# EAGLE board usb-foc (EAGLE 9.6.2)
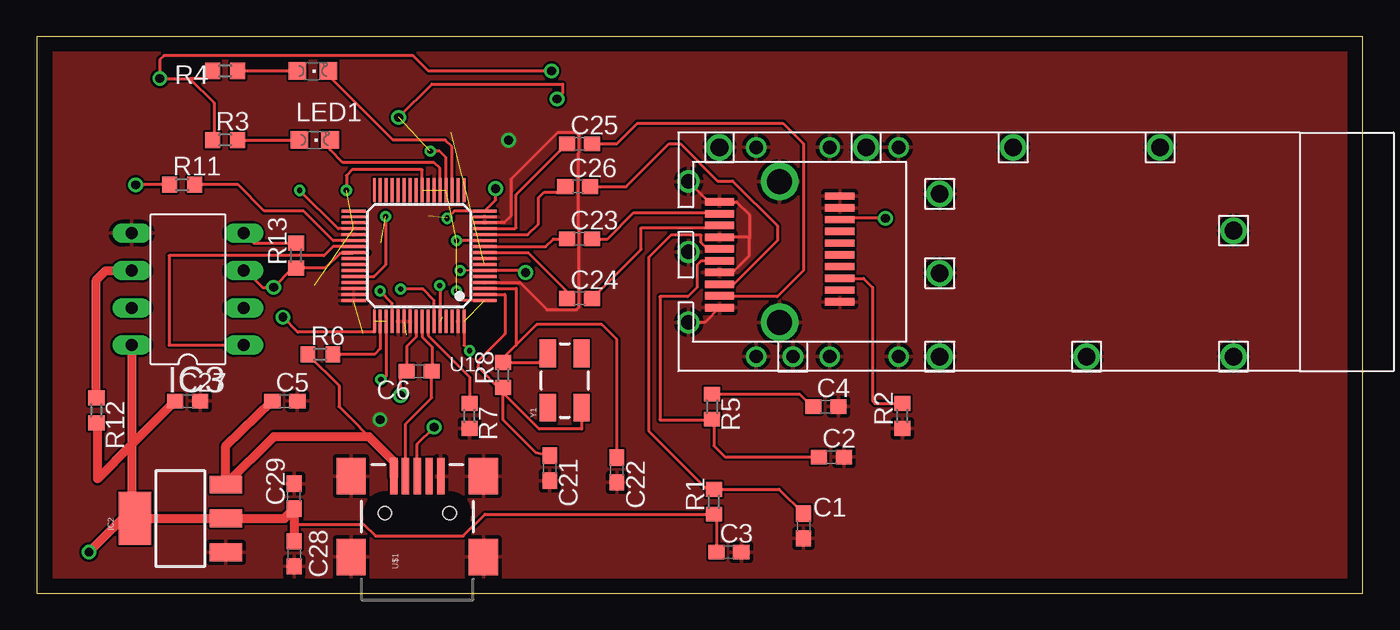
[diagram p0: board, top side]
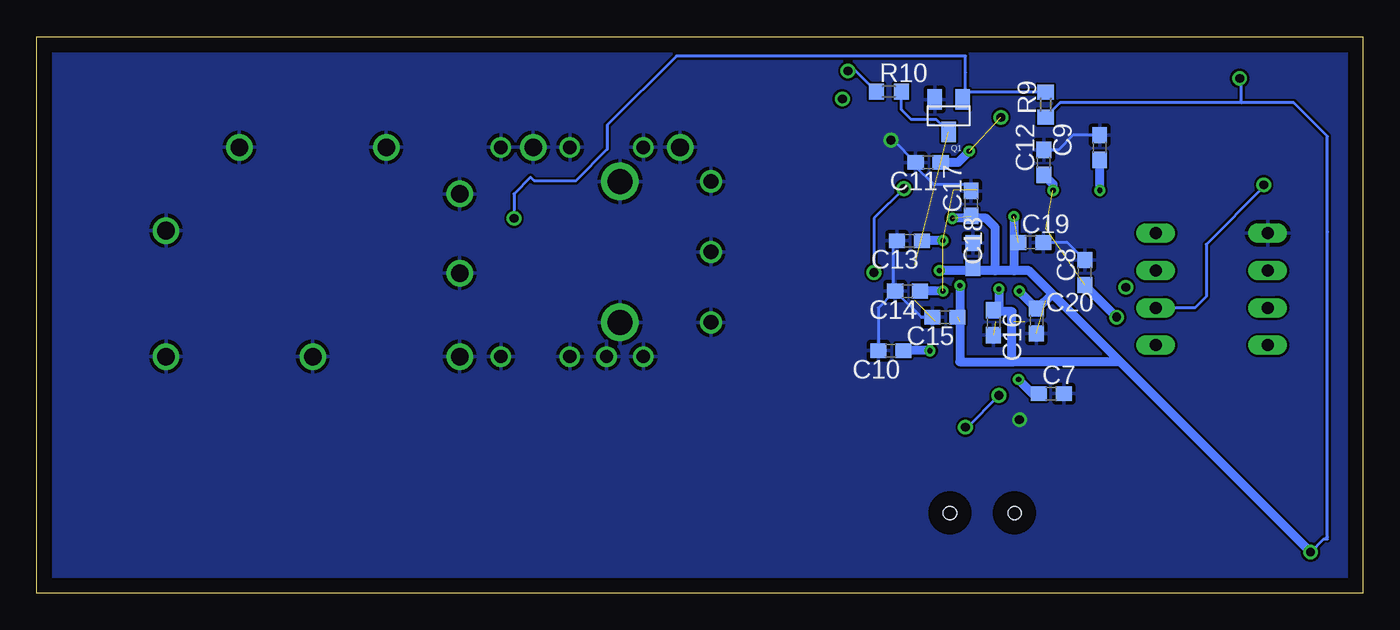
[diagram p1: board, bottom side, seen from below]

Size 90.28 x 37.9 mm. Coordinates in mm from the lower left corner, seen from the top.
Outline: 0,0 90.28,0 90.28,37.9 0,37.9 0,0
Copper layers (1*16): Top 0.035mm / dielectric 1.5mm / Bottom 0.035mm
Design rules "default": minimum track width 6mil, minimum drill 0.35mm, track to track 6mil, track to pad 6mil, pad to pad 6mil, via to via 6mil, smd to smd 6mil, copper to edge 40mil, drill to drill 6mil, minimum pad ring 10mil, minimum via ring 8mil, stop-mask expansion 4mil, vias tented up to drill 0mil, thermal gap 10mil

## Footprints (pad centres in the part's own frame; a part is rotated, then mirrored left to right if it is on the bottom)
RCL_C0603 = smd 1.1 x 1: 1 -0.85,0; 2 0.85,0
SPARKFUN-POWERIC_SOT223 = smd 1.219 x 2.235: 1 -2.311,-3.099; 2 0,-3.099; 3 2.311,-3.099 | smd 3.6 x 2.2: 4 0,3.099
MICROCHIP_DIL8 = drill 0.813 long: 1 -3.81,-3.81; 2 -1.27,-3.81; 3 1.27,-3.81; 4 3.81,-3.81; 5 3.81,3.81; 6 1.27,3.81; 7 -1.27,3.81; 8 -3.81,3.81
LED_CHIPLED_0805 = smd 1.2 x 1.2: A 0,-1.05; C 0,1.05
SPARKFUN-DISCRETESEMI_SOT23 = smd 1 x 1.4: 1 -0.95,-1.1; 2 0.95,-1.1; 3 0,1.1
RCL_R0603 = smd 1 x 1.1: 1 -0.85,0; 2 0.85,0
BALTO_LQFP64-0.4MM = smd 0.203 x 1.626: 1 -3.048,-4.47; 2 -2.642,-4.47; 3 -2.235,-4.47; 4 -1.829,-4.47; 5 -1.422,-4.47; 6 -1.016,-4.47; 7 -0.61,-4.47; 8 -0.203,-4.47; 9 0.203,-4.47; 10 0.61,-4.47; 11 1.016,-4.47; 12 1.422,-4.47; 13 1.829,-4.47; 14 2.235,-4.47; 15 2.642,-4.47; 16 3.048,-4.47; 33 3.048,4.47; 34 2.642,4.47; 35 2.235,4.47; 36 1.829,4.47; 37 1.422,4.47; 38 1.016,4.47; 39 0.61,4.47; 40 0.203,4.47; 41 -0.203,4.47; 42 -0.61,4.47; 43 -1.016,4.47; 44 -1.422,4.47; 45 -1.829,4.47; 46 -2.235,4.47; 47 -2.642,4.47; 48 -3.048,4.47 | smd 1.626 x 0.203: 17 4.47,-3.048; 18 4.47,-2.642; 19 4.47,-2.235; 20 4.47,-1.829; 21 4.47,-1.422; 22 4.47,-1.016; 23 4.47,-0.61; 24 4.47,-0.203; 25 4.47,0.203; 26 4.47,0.61; 27 4.47,1.016; 28 4.47,1.422; 29 4.47,1.829; 30 4.47,2.235; 31 4.47,2.642; 32 4.47,3.048; 49 -4.47,3.048; 50 -4.47,2.642; 51 -4.47,2.235; 52 -4.47,1.829; 53 -4.47,1.422; 54 -4.47,1.016; 55 -4.47,0.61; 56 -4.47,0.203; 57 -4.47,-0.203; 58 -4.47,-0.61; 59 -4.47,-1.016; 60 -4.47,-1.422; 61 -4.47,-1.829; 62 -4.47,-2.235; 63 -4.47,-2.642; 64 -4.47,-3.048
BALTO_SFP = smd 2 x 0.5: 1 31.3,3.4; 2 31.3,2.6; 3 31.3,1.8; 4 31.3,1; 5 31.3,0.2; 6 31.3,-0.6; 7 31.3,-1.4; 8 31.3,-2.2; 9 31.3,-3; 10 31.3,-3.8; 11 39.5,-3.4; 12 39.5,-2.6; 13 39.5,-1.8; 14 39.5,-1; 15 39.5,-0.2; 16 39.5,0.6; 17 39.5,1.4; 18 39.5,2.2; 19 39.5,3; 20 39.5,3.8 | drill 1: P$1 41.6,0; P$2 41.6,-4.8; P$3 41.6,4.8 | drill 0.9: P$4 34.5,7.13; P$6 37,7.13; P$7 37,-7.12; P$8 32,7.13; P$9 32,-7.12; P$11 27.3,7.13; P$12 27.3,-7.12 | drill 1.2: P$5 29.5,-7.12; P$10 39.5,-7.12; P$13 24.5,7.13; P$14 24.5,1.45; P$15 14.5,7.13; P$16 24.5,-3.95; P$17 4.5,7.13; P$18 4.5,-1.45; P$19 19.5,-7.12; P$20 9.5,-7.12 | drill 1.7: P$21 35.4,-4.8; P$22 35.4,4.8
SPARKFUN-CONNECTORS_USB-MINIB = smd 2.5 x 0.5: D+ 2.5,0; D- 2.5,0.8; GND 2.5,-1.6; ID 2.5,-0.8; VBUS 2.5,1.6 | smd 2.5 x 2: MTN1 -3,4.5; MTN2 2.5,4.5; MTN3 -3,-4.5; MTN4 2.5,-4.5 | hole 0.9: 0,2.2; 0,-2.2
SPARKFUN-FREQCTRL_CRYSTAL-SMD-5X3 = smd 1.9 x 1.1: 1 -1.85,-1.15; 2 1.85,-1.15; 3 1.85,1.15; 4 -1.85,1.15

## Placement (x,y rotation side)
C1  .1u  [RCL_C0603]  52.2,4.57 270 top
C2  .1u  [RCL_C0603]  54.1,9.27 0 top
C3  .1u  [RCL_C0603]  47.12,2.79 0 top
C4  .1u  [RCL_C0603]  53.72,12.7 0 top
C5  .1u  [RCL_C0603]  16.89,13.08 0 top
C6  3p3  [RCL_C0603]  26.03,15.11 180 top
C7  .1u  [RCL_C0603]  21.21,13.59 0 bottom
C8  .1u  [RCL_C0603]  18.92,21.84 90 bottom
C9  .1u  [RCL_C0603]  17.91,30.35 90 bottom
C10  .1u  [RCL_C0603]  32.13,16.51 180 bottom
C11  .1u  [RCL_C0603]  29.59,29.34 180 bottom
C12  .1u  [RCL_C0603]  21.72,29.34 90 bottom
C13  .1u  [RCL_C0603]  30.86,24 180 bottom
C14  .1u  [RCL_C0603]  30.99,20.57 180 bottom
C15  .1u  [RCL_C0603]  28.45,18.8 180 bottom
C16  .1u  [RCL_C0603]  25.15,18.41 270 bottom
C17  .1u  [RCL_C0603]  26.67,26.54 90 bottom
C18  .1u  [RCL_C0603]  26.54,22.99 90 bottom
C19  .1u  [RCL_C0603]  22.61,23.88 0 bottom
C20  .1u  [RCL_C0603]  22.23,18.54 270 bottom
C21  33p  [RCL_C0603]  34.92,8.51 270 top
C22  33p  [RCL_C0603]  39.5,8.38 270 top
C23  1u  [RCL_C0603]  36.96,24.13 0 top
C24  1u  [RCL_C0603]  36.96,20.07 0 top
C25  1u  [RCL_C0603]  36.96,30.61 0 top
C26  1u  [RCL_C0603]  36.83,27.69 0 top
C27  1u  [RCL_C0603]  10.29,13.08 0 top
C28  .1u  [RCL_C0603]  17.53,2.67 270 top
C29  .1u  [RCL_C0603]  17.53,6.6 90 top
IC2  [SPARKFUN-POWERIC_SOT223]  9.78,5.08 90 top
IC3  MICROCHIP_93LC66P  [MICROCHIP_DIL8]  10.29,20.7 90 top
LED1  [LED_CHIPLED_0805]  18.92,30.86 270 top
LED2  [LED_CHIPLED_0805]  18.8,35.56 270 top
Q1  SPARKFUN-DISCRETESEMI_MOSFET-NCHANNELBSS123LT1G  [SPARKFUN-DISCRETESEMI_SOT23]  28.19,32.51 180 bottom
R1  0  [RCL_R0603]  46.1,6.22 90 top
R2  82  [RCL_R0603]  58.93,12.06 90 top
R3  330  [RCL_R0603]  12.83,30.86 0 top
R4  330  [RCL_R0603]  12.83,35.56 0 top
R5  0  [RCL_R0603]  45.97,12.7 270 top
R6  4k7  [RCL_R0603]  19.3,16.26 0 top
R7  12k  [RCL_R0603]  29.46,12.06 270 top
R8  1M  [RCL_R0603]  31.75,14.86 90 top
R9  4k7  [RCL_R0603]  21.59,33.27 90 bottom
R10  4k7  [RCL_R0603]  32.26,34.16 0 bottom
R11  22  [RCL_R0603]  9.91,27.81 0 top
R12  4k7  [RCL_R0603]  4.06,12.45 270 top
R13  22  [RCL_R0603]  17.65,22.99 90 top
U1  BALTO_AX88772BLP  [BALTO_LQFP64-0.4MM]  26.03,22.99 90 top
U2  BALTO_SFP  [BALTO_SFP]  85.98,23.24 180 top
U$1  SPARKFUN-CONNECTORS_USB-MINIB-5PIN  [SPARKFUN-CONNECTORS_USB-MINIB]  25.91,5.46 90 top
Y1  [SPARKFUN-FREQCTRL_CRYSTAL-SMD-5X3]  35.94,14.48 90 top

## Library data of the parts
C1-C29 IC2 LED1 LED2 R1-R13 U1 U2 U$1 Y1 = usb-100basefx
IC3 = usb-100basefx; MF: MICROCHIP; MPN: 93LC66/P; OC_FARNELL: 1556169; OC_NEWARK: 62K2086
Q1 = usb-100basefx; PROD_ID: TRANS-08345

## Nets
GND: C1.2 C2.2 C3.2 C4.2 C5.2 C7.2 C8.2 C9.2 C10.2 C11.2 C12.2 C13.2 C14.2 C15.2 C16.2 C17.2 C18.2 C19.2 C20.2 C21.2 C22.2 C27.2 C28.2 C29.2 IC2.1 IC3.5 Q1.2 R2.1 R7.2 U1.4 U1.8 U1.14 U1.15 U1.22 U1.37 U1.46 U1.47 U1.48 U1.53 U1.54 U1.55 U1.63 U2.1 U2.9 U2.10 U2.11 U2.14 U2.17 U2.20 U2.P$1 U2.P$2 U2.P$3 U2.P$4 U2.P$5 U2.P$6 U2.P$7 U2.P$8 U2.P$9 U2.P$10 U2.P$11 U2.P$12 U2.P$13 U2.P$14 U2.P$15 U2.P$16 U2.P$17 U2.P$18 U2.P$19 U2.P$20 U2.P$21 U2.P$22 U$1.GND U$1.MTN1 U$1.MTN2 U$1.MTN3 U$1.MTN4
N$1: C2.1 R5.2 U2.16
N$2: C1.1 R1.2 U2.15
N$4: C4.1 R5.1
N$5: Q1.1 R9.2 U2.8
N$6: LED1.A R3.2
N$7: LED2.A R4.2
N$8: LED1.C U1.21
N$9: LED2.C U1.19
N$10: C6.1 U1.57 U$1.D-
N$11: C6.2 U1.56 U$1.D+
N$12: C5.1 IC2.3 R6.1 U$1.VBUS
N$13: R6.2 U1.50
N$14: R7.1 U1.58
N$15: C21.1 R8.1 U1.2 Y1.1
N$16: C23.1 U1.10
N$17: C7.1 C8.1 C9.1 C10.1 C11.1 C12.1 C13.1 C14.1 U1.1 U1.11 U1.20 U1.24 U1.36 U1.49 U1.51 U1.64
N$18: C22.1 R8.2 U1.3 Y1.3
N$19: C24.1 U1.9
N$20: C25.1 U1.13
N$21: C26.1 U1.12
N$22: C24.2 U2.13
N$23: Q1.3 R10.2 U1.7
N$24: C25.2 U2.19
N$25: C26.2 U2.18
N$26: C23.2 U2.12
N$27: IC3.2 R11.1
N$28: R11.2 U1.38
N$29: IC3.1 U1.39
N$30: IC3.6 R12.1
N$31: IC3.3 R13.1 U1.40
N$32: IC3.4 R13.2
N$33: R2.2 U2.3
VCC: C3.1 C15.1 C16.1 C17.1 C18.1 C19.1 C20.1 C27.1 C28.1 C29.1 IC2.2 IC2.4 IC3.8 R1.1 R3.1 R4.1 R9.1 R10.1 R12.2 U1.6 U1.16 U1.44 U1.52 U1.59 U1.60

## Tracks (layer width: path | path; a pad name or v marks a point on that pad's centre or on a via)
GND  (via drill 0.6)  (2 unrouted)
  Top 0.203: U1.4 32.89,21.16 34.73,19.31 36.76,19.31 36.91,19.46 36.91,24.73 36.88,24.77 36.88,29.97 36.91,30 36.91,31.21 36.76,31.36 35.45,31.36 32.28,28.19 32.28,25.68 31.83,25.22 U1.14 | U2.20 45.48,18.44 U2.P$3 | U2.17 47.37,21.84 48.51,22.99 48.51,24.13 | 48.51,24.13 48.4,24.24 U2.14 | 48.51,24.13 48.51,25.78 47.65,26.64 U2.11 45.78,26.64 U2.P$2
  Bottom 0.203: C15.2 30.06,18.8 C14.2 31.98,20.43 | 31.98,20.43 32.98,19.43 C10.2 | C13.2 31.98,23.73 31.98,20.43 | C17.2 27.09,27.81 29.21,27.81 30.44,29.04 C11.2 31.96,30.86 v32.13,30.86 | C8.2 20.1,23.88 C19.2 | C9.2 19.72,31.2 20.74,30.19 C12.2
  other vias: 23.37,11.81
  pour Top: 0.89,37.59 89.41,37.59 89.41,0 0.76,0 0.89,0.13
  pour Bottom: 0.89,37.34 89.23,37.34 89.23,0.13 0.89,0.13
N$1
  Top 0.203: U2.16 46.44,22.61 45.21,22.61 44.96,22.35 44.96,20.83 44.32,20.19 42.42,20.19 42.42,11.81 45.93,11.81 R5.2 46.1,11.72 46.1,10.03 46.86,9.27 C2.1
N$2
  Top 0.203: U2.15 45.67,23.44 45.23,23.89 45.23,24.37 45.21,24.38 43.18,24.38 41.66,22.86 41.66,11.05 45.63,7.07 R1.2 50.55,7.07 C1.1
N$4
  Top 0.203: R5.1 51.94,13.55 52.92,12.57 52.92,12.65 C4.1
N$5  (via drill 0.6)
  Top 0.203: U2.8 54.77,25.53 v57.78,25.53
  Bottom 0.203: R9.2 26.73,34.12 Q1.1 27.05,33.8 27.05,35.47 | 27.05,35.47 | 27.05,35.47 27.05,36.58 46.74,36.58 51.43,31.88 51.43,30.23 53.59,28.07 56.39,28.07 56.64,28.32 57.78,27.18 v57.78,25.53
N$6
  Top 0.203: R3.2 LED1.A
N$7
  Top 0.203: LED2.A R4.2
N$8
  Top 0.203: U1.21 27.46,28.93 27.05,29.34 20.83,29.34 19.97,30.19 LED1.C
N$9
  Top 0.203: U1.19 28.27,30.4 27.81,30.86 24.26,30.86 19.85,35.27 LED2.C
N$10
  Top 0.203: U$1.D- 25.11,11.52 26.88,13.3 C6.1 26.92,15.15 26.92,16.76 26.24,17.45 U1.57
N$11  (via drill 0.6)
  Top 0.203: U$1.D+ 25.91,10.16 v27.05,11.3 | U1.56 25.83,17.45 25.18,16.8 C6.2 24.77,14.69 v24.77,13.46
  Bottom 0.203: v27.05,11.3 26.92,11.3 v24.77,13.46
N$12
  Top 0.203: R6.1 20.57,14.14 20.57,12.7 23.37,9.91
  Top 0.61: U$1.VBUS 24.31,8.97 23.37,9.91 22.61,10.67 16.15,10.67 IC2.3 12.88,10.03 C5.1
N$13
  Top 0.203: U1.50 23.39,16.66 22.99,16.26 R6.2
N$14
  Top 0.203: U1.58 26.64,17.55 29.46,14.73 R7.1
N$15
  Top 0.203: R8.1 31.58,13.84 30.04,15.39 30.04,15.81 31.88,17.65 31.88,20.32 31.85,20.34 U1.2 | Y1.1 37.09,11.18 37.1,11.17 34.21,11.17 31.5,13.88 31.62,13.88 R8.1 | C21.1 34.01,9.55 31.75,11.81 R8.1
N$16
  Top 0.203: U1.10 34.65,23.6 35.18,24.13 C23.1
N$17  (via drill 0.35, 0.6)  (8 unrouted)
  Top 0.203: v24.64,32.41 26.9,34.67 35.81,34.67 35.81,34.04 v35.43,33.66 | U1.1 28.96,19.94 28.57,20.32 v28.57,20.57 | U1.11 v28.57,24 | U1.24 26.24,28.83 21.46,28.83 21.08,28.45 v21.08,27.43 | U1.20 27.86,29.67 27.43,30.1 v26.8,30.1 | U1.36 20.52,24.82 v17.91,27.43 | U1.49 22.99,17.78 17.78,17.78 v16.76,18.8 | U1.51 23.8,14.78 23.49,14.48 v23.43,14.54 | U1.64 29.08,16.89 v29.46,16.51
  Bottom 0.203: 17.65,29.25 C9.1 18.29,29.12 | C12.1 21.59,28.36
  Bottom 0.61: v28.57,20.57 C14.1 | v28.57,24 C13.1 | C12.1 21.08,27.85 v21.08,27.43 | v26.8,30.1 27.56,29.34 C11.1 | v17.91,27.43 C9.1 | v16.76,18.8 18.92,20.95 C8.1 | v23.43,14.54 22.48,13.59 C7.1 | v29.46,16.51 C10.1
N$18
  Top 0.203: 32.15,15.31 R8.2 | U1.3 32.64,20.75 32.64,16.89 | R8.2 31.75,16 32.64,16.89 | R8.2 34.17,15.71 Y1.3 | C22.1 39.5,17.27 38.48,18.29 34.04,18.29 32.64,16.89
N$19
  Top 0.203: U1.9 33.45,23.19 33.97,22.67 34.04,22.61 36.11,20.53 C24.1
N$20
  Top 0.203: C25.1 32.64,27.14 32.64,24.89 32.56,24.82 U1.13
N$21
  Top 0.203: U1.12 33.43,24.41 34.16,25.15 34.16,26.92 34.54,27.3 35.6,27.3 C26.1
N$22
  Top 0.203: C24.2 41.15,23.41 41.15,24.89 46.33,24.89 U2.13
N$23  (1 unrouted)
  Bottom 0.203: Q1.3 29.04,32.26 30.73,32.26 31.41,32.93 R10.2
N$24
  Top 0.203: C25.2 39.5,30.61 40.89,32 50.8,32 52.2,30.61 52.2,21.97 50.42,20.19 46.53,20.19 U2.19
N$25
  Top 0.203: C26.2 40.13,27.69 43.05,30.61 43.81,30.61 46.35,28.07 47.37,28.07 50.42,25.02 50.42,24 47.37,20.95 46.56,20.95 U2.18
N$26
  Top 0.203: C23.2 38.86,24.13 40.64,25.91 46.41,25.91 U2.12
N$27  (via drill 0.6)
  Top 0.203: R11.1 v6.73,27.81
  Bottom 0.203: v6.73,27.81 6.73,27.69 10.67,23.75 10.67,20.19 11.43,19.43 IC3.2
N$28
  Top 0.203: U1.38 20.19,24 18.16,26.03 15.49,26.03 13.72,27.81 R11.2
N$29
  Top 0.203: U1.39 20.17,23.6 19.56,22.99 9.02,22.99 9.02,16.89 IC3.1
N$30
  Top 0.61: R12.1 4.06,21.34 4.7,21.97 IC3.6
N$31  (via drill 0.6)
  Top 0.203: IC3.3 14.22,21.97 15.37,20.83 v16.13,20.83 17.44,22.14 R13.1 19.64,22.14 20.65,23.14 21.51,23.14 U1.40 22.55,23.19
N$32
  Top 0.203: IC3.4 14.77,23.84 R13.2
N$33
  Top 0.203: U2.3 56.28,21.44 56.9,20.83 56.9,13.08 57.06,12.91 R2.2
VCC  (via drill 0.35, 0.6)  (3 unrouted)
  Top 0.152: U1.6 v28.83,21.97
  Top 0.203: C3.1 46.27,5.21 R1.1 30.52,5.37 29.04,3.89 23.06,3.89 22.25,4.7 17.53,4.7 | v31.24,27.56 31.24,26.77 U1.16 28.45,26.03 v27.94,25.53 | U1.6 33.15,21.97 v33.27,21.84 | 10.41,35.05 v8.38,35.05 8.38,36.32 8.68,36.62 25.4,36.62 25.61,36.62 26.67,35.56 v35.05,35.56 | 10.41,35.05 12.06,33.4 12.06,30.95 R3.1 | R4.1 11.47,35.05 10.41,35.05 | U1.44 22.96,21.56 23.75,22.35 v23.75,25.65 | U1.52 24.21,19.74 v23.37,20.57 | U1.59 27.05,19.94 26.29,20.7 v24.77,20.7 | v27.43,20.95 27.46,20.93 U1.60
  Top 0.61: C28.1 17.53,4.7 C29.1 16.85,5.08 IC2.2 IC2.4 | 6.48,10.12 6.48,5.28 IC2.4 | R12.2 4.14,11.52 4.14,7.78 6.48,10.12 | C27.1 6.48,10.12 | IC3.8 6.48,10.12 | IC2.4 5.84,5.08 v3.56,2.79
  Bottom 0.203: 25.38,19.03 25.25,19.16 C16.1 | v31.24,27.56 33.27,25.53 v33.27,21.84 | v3.56,2.79 2.67,3.68 2.54,3.68 | 2.54,3.68 2.41,3.68 | 2.54,3.68 2.41,3.81 2.41,24.58 2.42,24.64 2.42,31.12 4.7,33.4 8.26,33.4 | R9.1 20.61,33.4 8.26,33.4 | 8.26,33.4 8.26,34.92 v8.38,35.05 | R10.1 34.5,35.56 v35.05,35.56 | v28.83,21.97 28.11,21.97 C18.1
  Bottom 0.61: R10.1 33.27,34.33 | 23.75,21.97 22.73,21.97 21.15,20.38 | 23.75,21.97 25.02,21.97 | 25.02,21.97 v28.83,21.97 | v3.56,2.79 16.51,15.75 | 16.51,15.75 21.15,20.38 | v23.75,25.65 23.75,21.97 | 25.02,21.97 25.02,24.89 25.65,25.53 v27.94,25.53 | 21.15,20.38 22.14,19.39 C20.1 23.37,20.53 v23.37,20.57 | v24.77,20.7 24.77,19.65 C16.1 | v27.43,20.95 27.43,15.75 23.75,15.75 | 16.51,15.75 23.75,15.75 | 23.75,15.75 23.88,15.88 23.88,19.18 25.23,19.18 25.25,19.16